# Altium PCB FOC_ESC.PcbDoc
Units mil, origin at the board's own origin, x right, y up, seen from the top; angles counter-clockwise.
Board outline 6000 x 5000 mil, 4 copper layers (Top Layer, PGND, PWR, Bottom Layer), stack 71.2 mil thick; 68 components, 57 nets, 269 pads, 20 vias.
Unrouted connection lines stored in the file: 70.
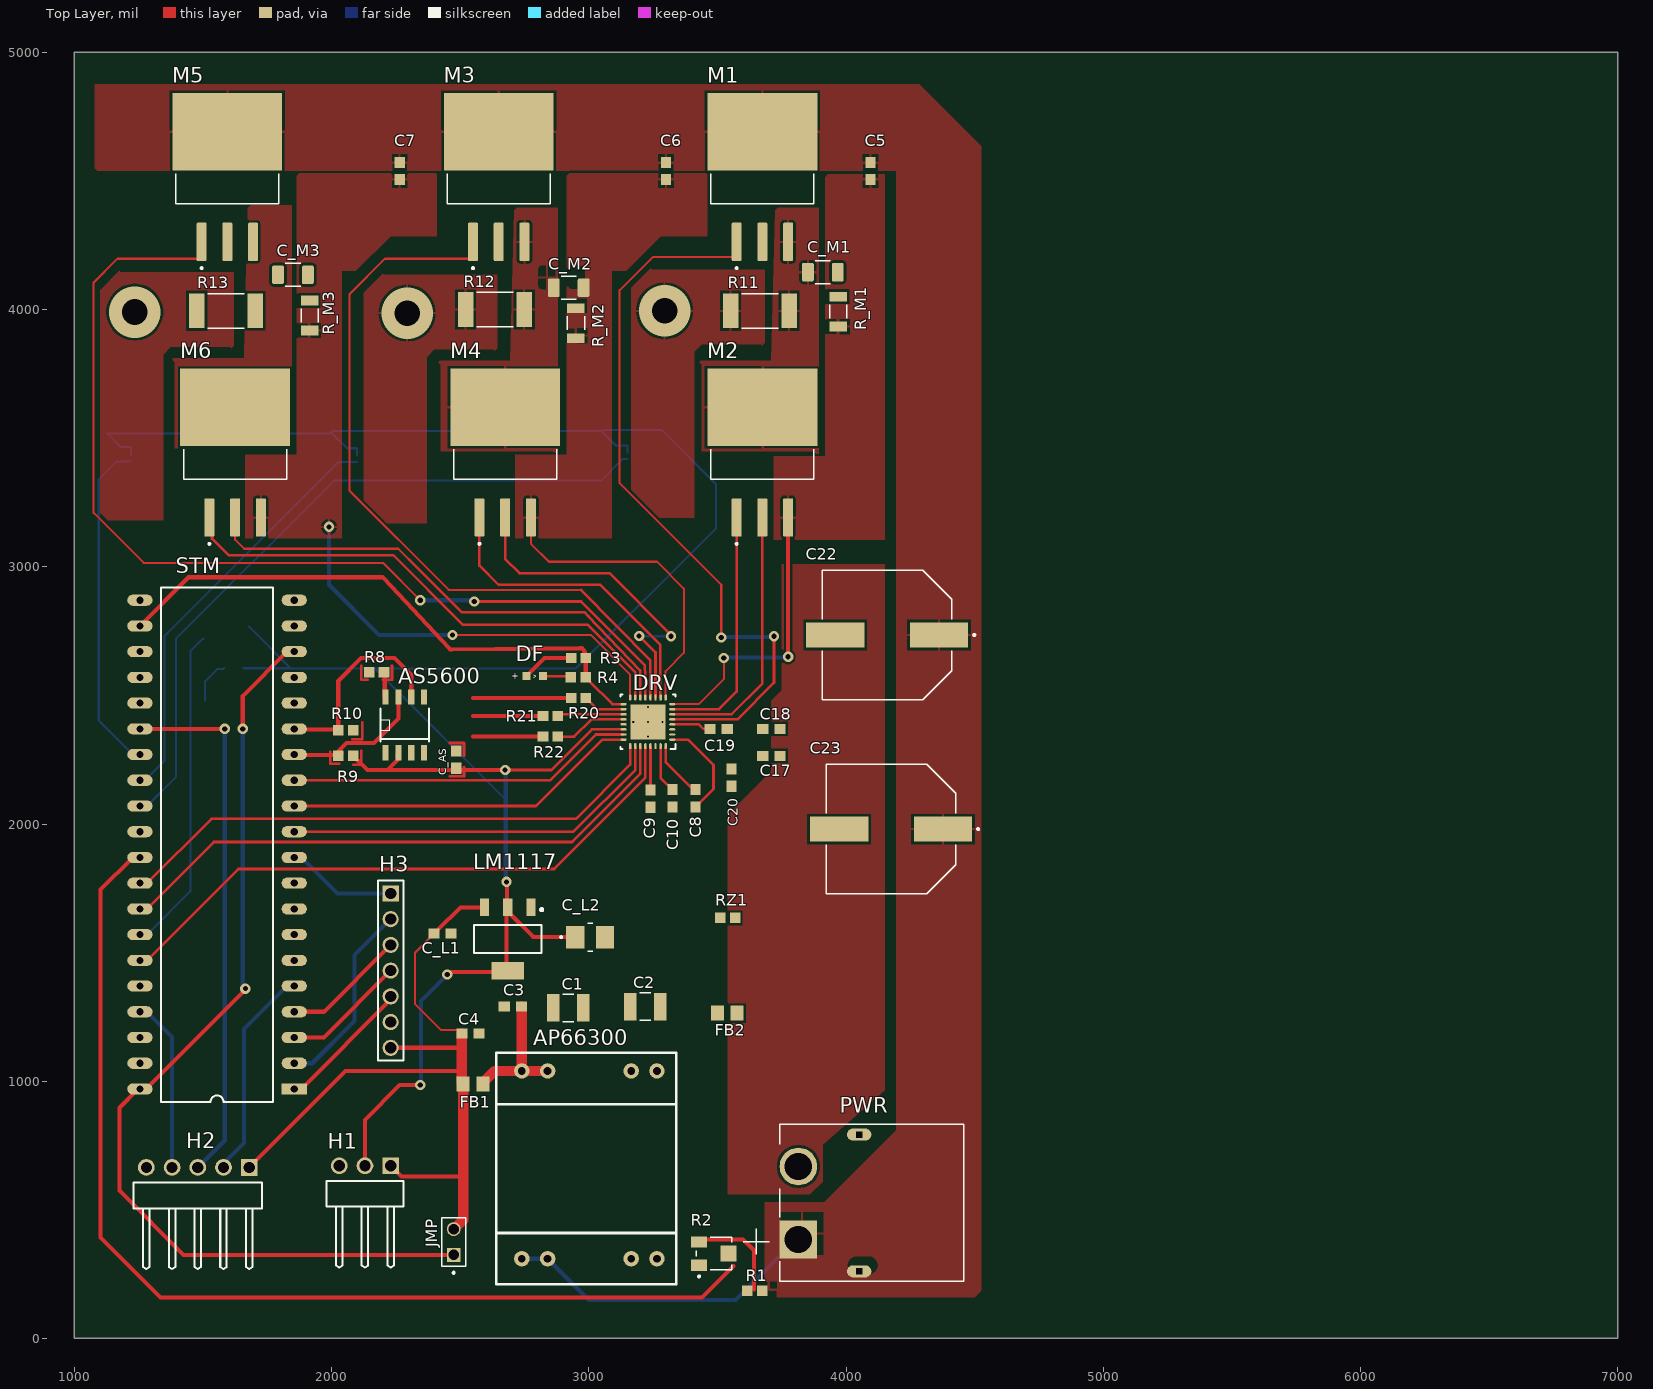
[diagram p0: Top Layer view]
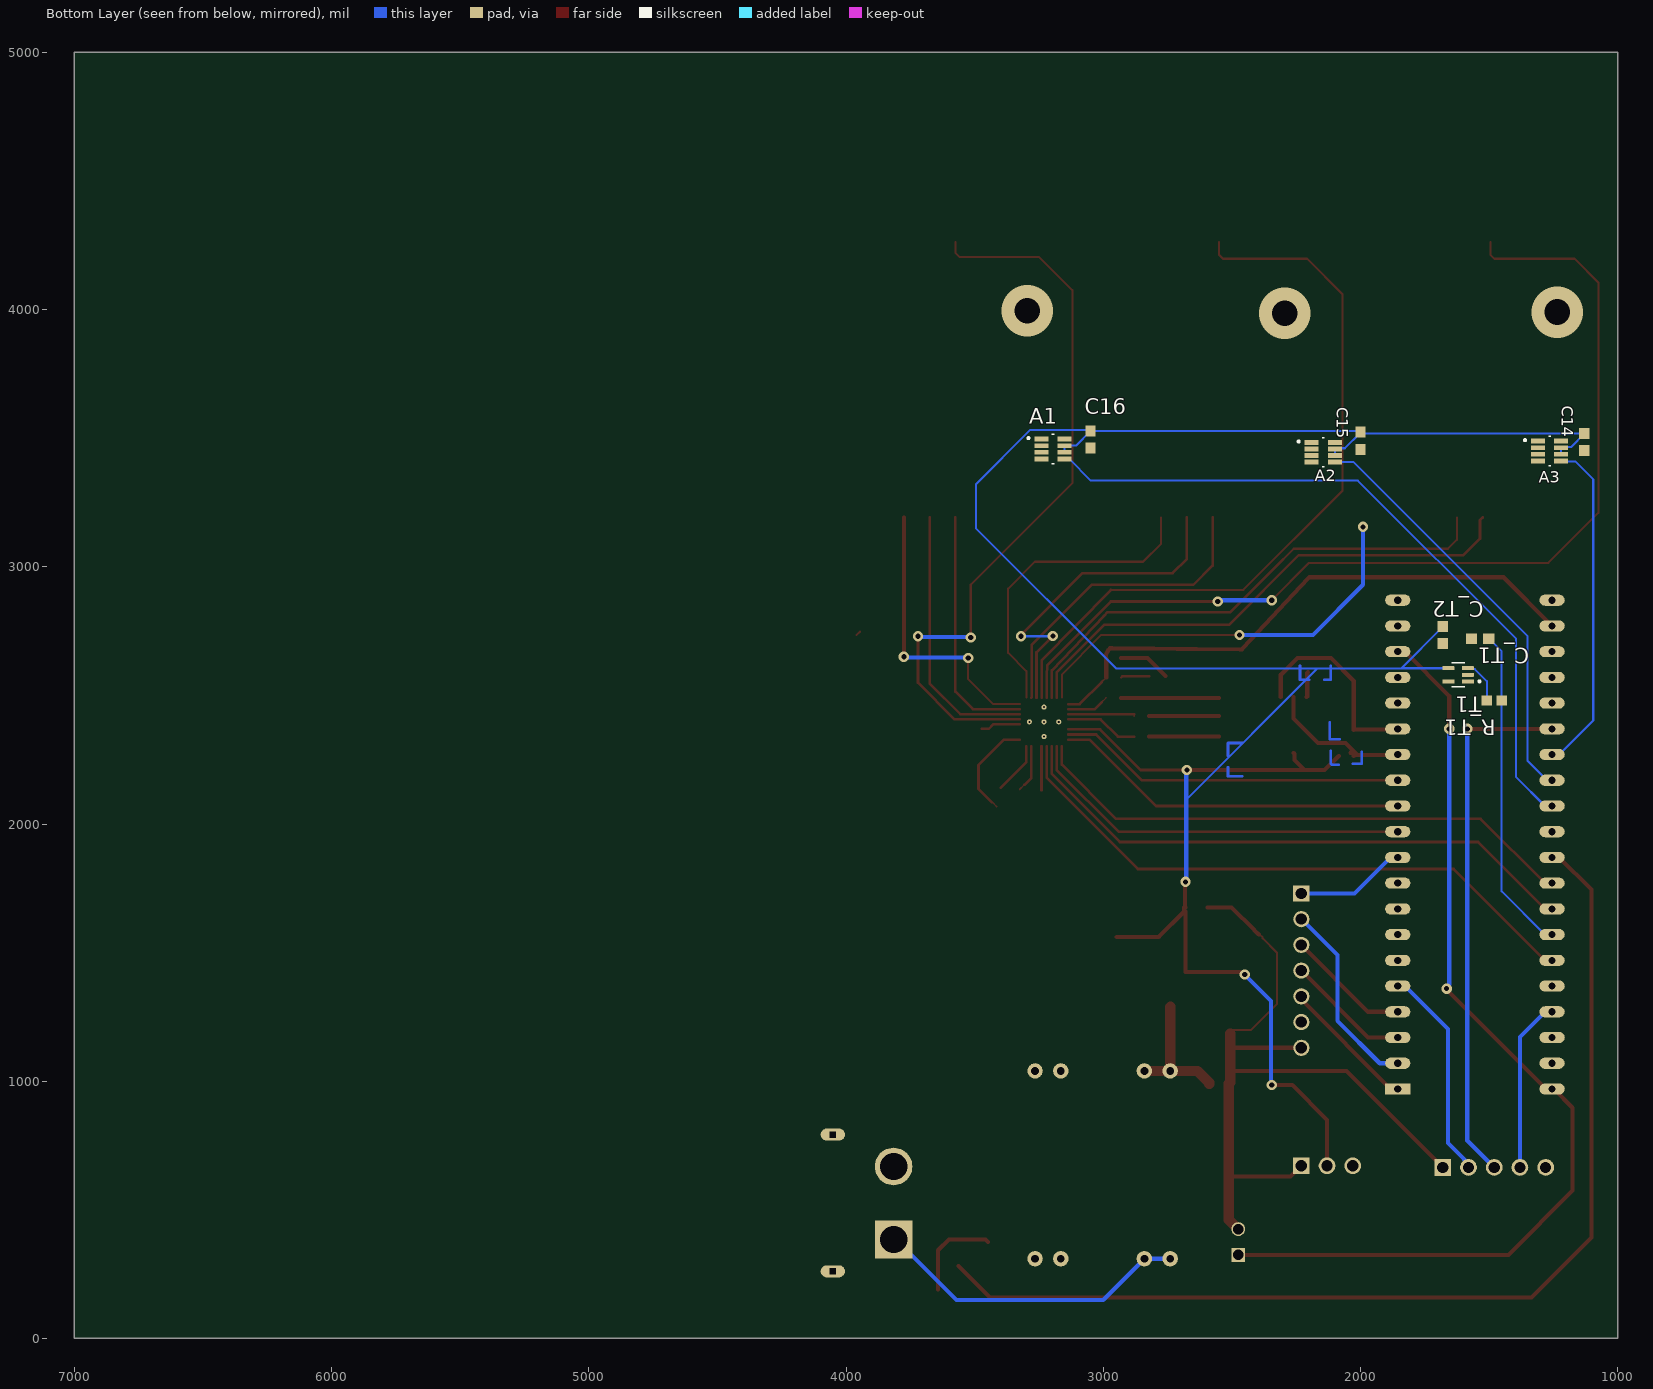
[diagram p1: Bottom Layer view, seen from below]
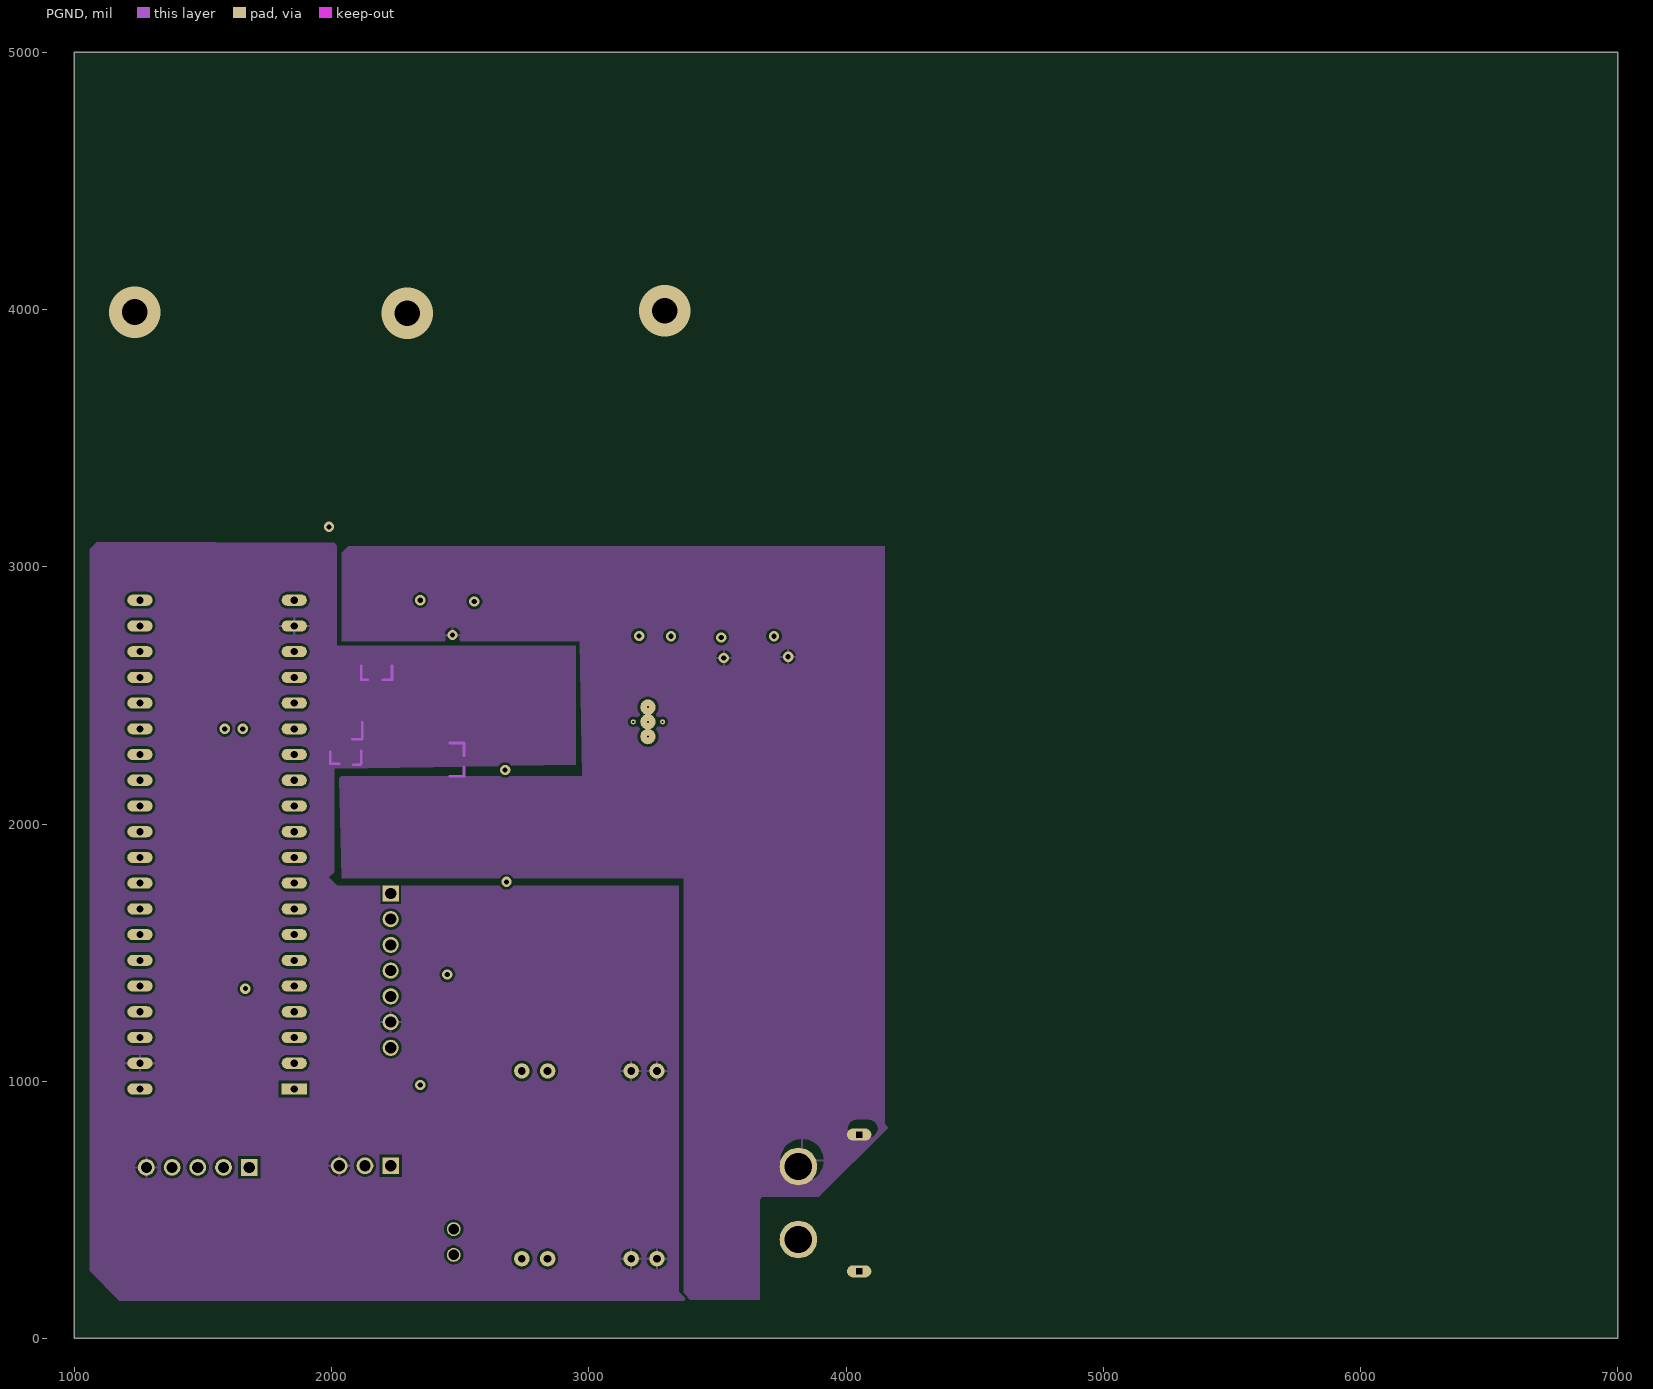
[diagram p2: PGND]
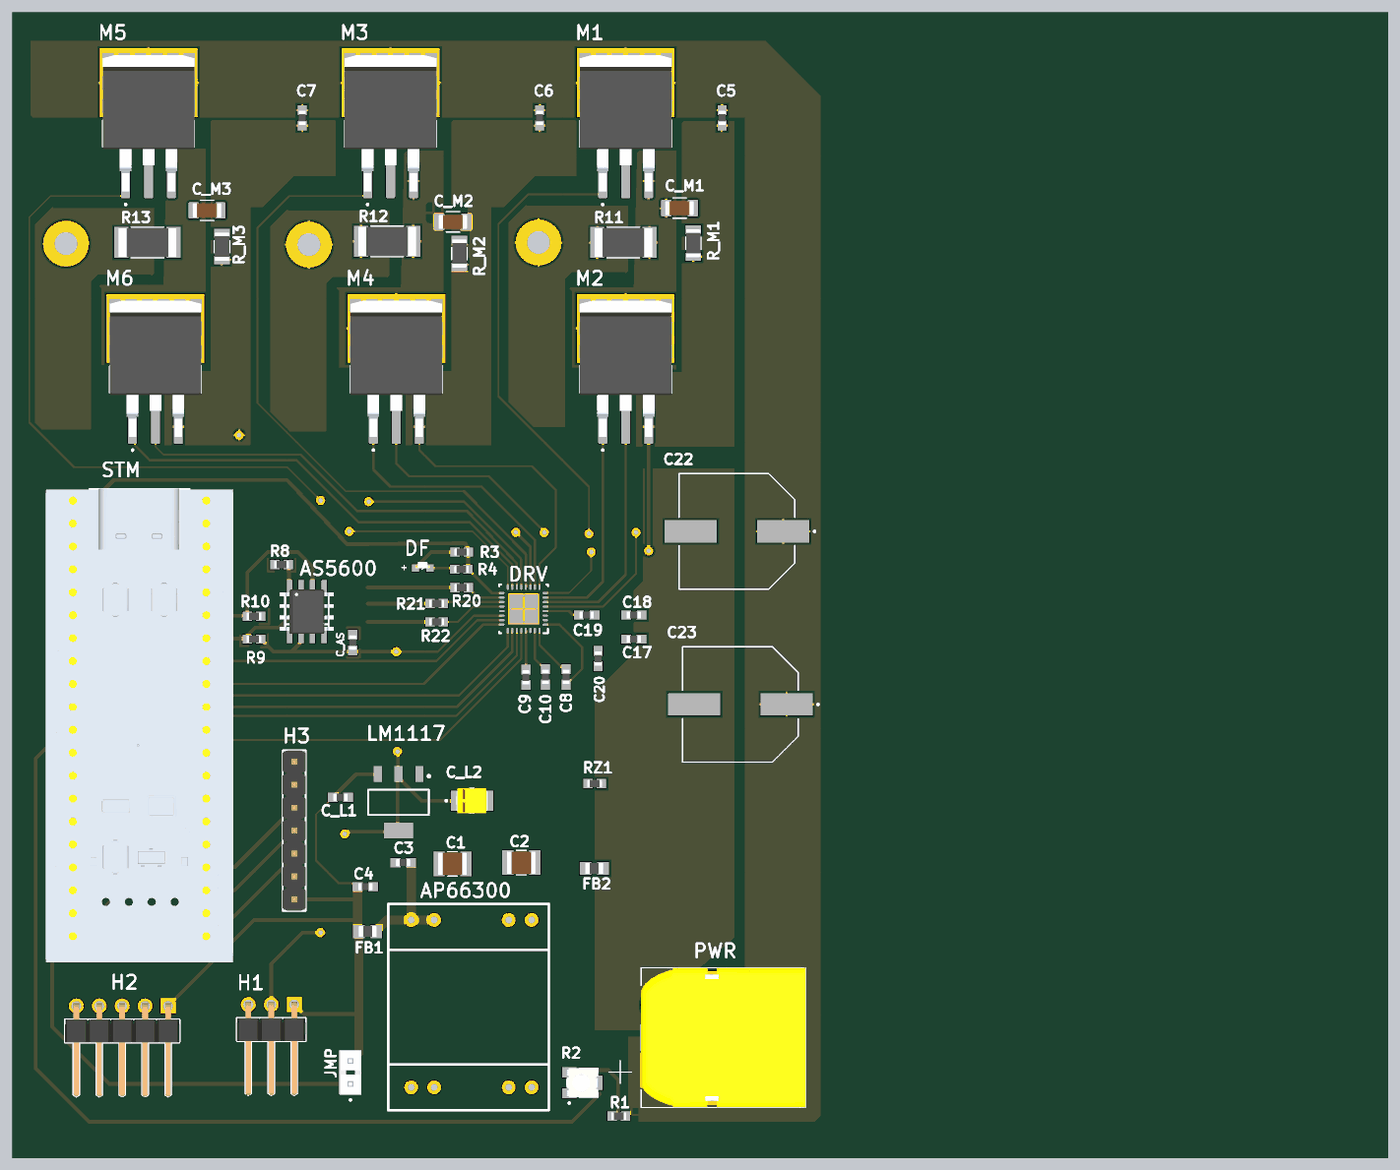
[diagram p3: 3D render of the assembled board from above, using the file's embedded part models]
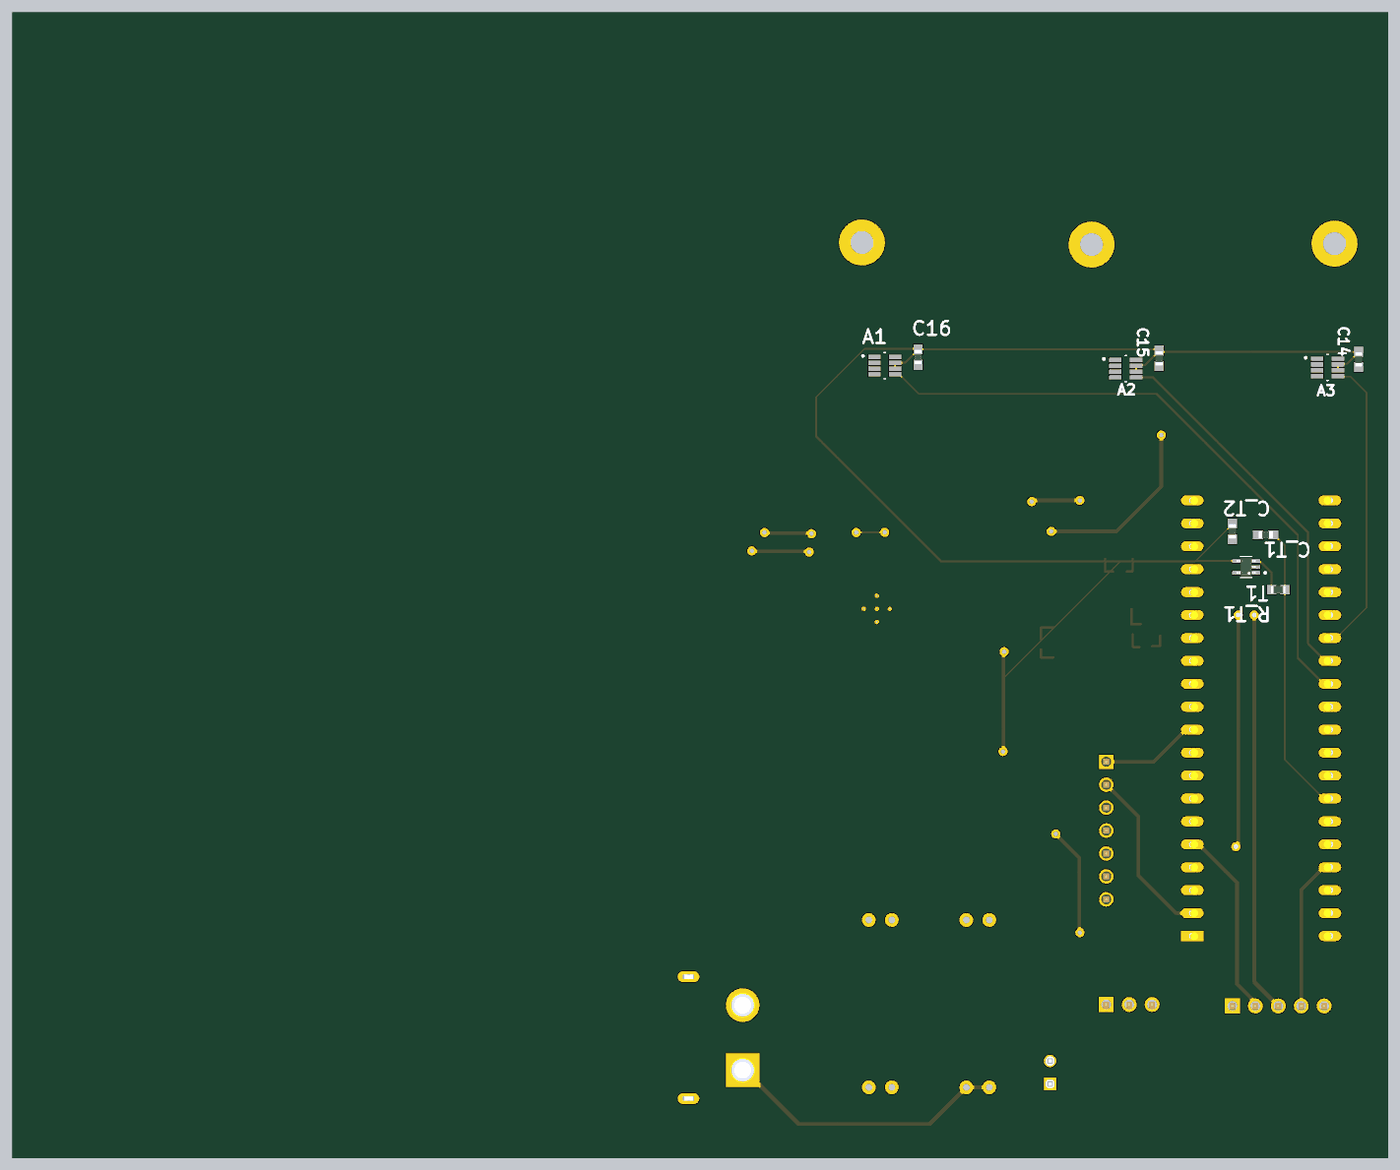
[diagram p4: 3D render of the assembled board from below, using the file's embedded part models]

## Layer stack, top to bottom
Top Solder: solder mask 0.4, Solder Resist, Dk 3.5
Top Layer: signal copper 2.8
Dielectric 1: core 20, FR-4 High Tg, Dk 4.2
PGND: signal copper 2.8
Dielectric 3: prepreg 20, FR-4 High Tg, Dk 4.2
PWR: signal copper 2.8
Dielectric 2: core 20, FR-4 High Tg, Dk 4.2
Bottom Layer: signal copper 2.8
Bottom Solder: solder mask 0.4, Solder Resist, Dk 3.5

## Board outline
1000,0 7000,0 7000,5000 1000,5000

## Design rules (kind name [scope] priority, off if disabled: settings)
Clearance [All] p1: gap=9 ignorepadtopadclearanceinfootprint=FALSE except(10: SMDPad-Fill SMDPad-Poly SMDPad-Region THPad-Fill THPad-Poly THPad-Region Via-Fill Via-Poly Via-Region Fill-Fill Fill-Poly Fill-Region Poly-Poly Poly-Region Region-Region)
PolygonConnect [All] p1: connectstyle=Relief reliefconductorwidth=10 reliefentries=4 polygonreliefangle="90 Angle" airgapwidth=10
RoutingVias [All] p1: holewidth=20 width=40 viastyle="Through Hole" minholewidth=20 minwidth=40 maxholewidth=28 maxwidth=50
SolderMaskExpansion [All] p1: expansion=4 istentingtop=FALSE
SupplyNets "Schematic Supply Nets" [InNet('3V3')] p1: voltage=0.000
SupplyNets "Schematic Supply Nets_8" [InNet('5V_STM')] p2: voltage=0.000
SupplyNets "Schematic Supply Nets_5" [InNet('PGND')] p3: voltage=0.000
SupplyNets "Schematic Supply Nets_4" [InNet('+5')] p4: voltage=0.000
SupplyNets "Schematic Supply Nets_2" [InNet('VBAT')] p5: voltage=0.000
SupplyNets "Schematic Supply Nets_1" [InNet('GND')] p6: voltage=0.000
Width [All] p1: maxlimit=16 minlimit=6 preferedwidth=10 toplayer_prefwidth=8 midlayer1_minwidth=10 midlayer1_maxwidth=10 midlayer2_minwidth=10 midlayer2_maxwidth=10 bottomlayer_prefwidth=8 minimp=50.000000 maximp=50.000000 favimp=50.000000
30 further rules are at their usual default settings.

## Components (designator, comment, footprint, x,y, rotation, side; value= is the part's Value field where it differs from the comment)
A1 "INA241A4IDDFR" SOT65P280X110-8N 3195.28,3457.79 r180 bottom
A2 "INA241A4IDDFR" SOT65P280X110-8N 2145,3445 r180 bottom
A3 "INA241A4IDDFR" SOT65P280X110-8N 1265,3450 r180 bottom
AP66300 "" MP1584 2740,310 r90 top (schematic designator "Buck- AP66300")
AS5600 "AS5600" SOIC8 2285,2385 r0 top
C1 "10uF 1210" CAPC3225X280N 2920,1285 r0 top
C2 "10uF 1210" CAPC3225X280N 3220,1290 r180 top
C3 "1uF 0603" CAPC1608X90 2705,1290 r0 top
C4 "1uF 0603" CAPC1608X90 2540,1185 r180 top
C5 "2.2uF 0603" CAPC1608X90 4095,4538.46 r270 top
C6 "2.2uF 0603" CAPC1608X90 3300,4538.47 r270 top
C7 "2.2uF 0603" CAPC1608X90 2265,4538.47 r270 top
C8 "47nF 0603" CAPC1608X90 3415,2100 r270 top
C9 "1uF 6.3V 0603" CAPC1608X90 3240,2098.46 r90 top
C10 "1uF 16V 0603" CAPC1608X90 3325,2100 r270 top
C14 "1uF 0603" CAPC1608X90 1130,3485 r90 bottom
C15 "1uF 0603" CAPC1608X90 2000,3490 r90 bottom
C16 "1uF 0603" CAPC1608X90 3050,3495 r90 bottom
C17 "0.1uF 100V 0603" CAPC1608X90 3710,2265 r180 top
C18 "0.1uF 12-25V 0603" CAPC1608X90 3710,2370 r180 top
C19 "0.1uF 100V 0603" CAPC1608X90 3505,2370 r0 top
C20 "2.2uF 0603" CAPC1608X90 3555,2180 r270 top
C22 "390uF Electrolytic" CAPAE1280X1400N 4160,2735 r180 top
C23 "390uF Electrolytic" CAPAE1280X1400N 4175,1980 r180 top
C_AS "1uF 0603" CAPC1608X90 2485,2250 r90 top
C_L1 "1uF 0603" CAPC1608X90 2431.54,1575 r180 top
C_L2 "10uF Tantalum" CAPMP3528X210N 3005,1560 r0 top
C_M1 "3900pF 1206" CAPC3216X110N 3910,4145 r180 top
C_M2 "3900pF 1206" CAPC3216X110N 2921.93,4085 r180 top
C_M3 "3900pF 1206" CAPC3216X110N 1850,4135 r180 top
C_T1 "1uF 0603" CAPC1608X90 1680,2735 r270 bottom
C_T2 "1uF 0603" CAPC1608X90 1535,2720 r180 bottom
DF "WL-SMCW_0603" WL-SMCW_0603 2790,2575 r180 top
DRV "DRV8350HRTVT" RTV0032E 3230,2397.09 r180 top
FB1 "Ferrite Bead 0805" FB_MI0805K400R-10 2550,990 r180 top
FB2 "Ferrite Bead 0805" FB_MI0805K400R-10 3538.31,1265 r180 top
H1 "61300311021" 61300311021 2130,480 r0 top
H2 "61300511021" 61300511021 1480,473.66 r0 top
H3 "61300711121" 61300711121 2230,1430 r270 top
JMP "3-644456-2" TE_3-644456-2 2475,325 r90 top
LM1117 "LM1117IMP-3.3/NOPB" DCY0004A_N 2685,1553.03 r270 top
M1 "CSD19536KTTT" TO254P1524X483-4N 3675,4515 r90 top
M2 "CSD19536KTTT" TO254P1524X483-4N 3675,3443.62 r90 top
M3 "CSD19536KTTT" TO254P1524X483-4N 2650,4515 r90 top
M4 "CSD19536KTTT" TO254P1524X483-4N 2675,3443.62 r90 top
M5 "CSD19536KTTT" TO254P1524X483-4N 1595,4515 r90 top
M6 "CSD19536KTTT" TO254P1524X483-4N 1625,3443.62 r90 top
PWR "XT60PW-M" AMASS_XT60PW-M 4051.22,526.73 r270 top
R1 "160k 0603" RESC1607X60N 3645,185.03 r180 top
R2 "0-10k POT" TRIM_3313J-2-104E 3486.11,330 r270 top
R3 "4.7K 0603" RESC1607X60N 2958.94,2570 r0 top
R4 "4.7K 0603" RESC1607X60N 2960,2645 r0 top
R8 "1K 0603" RESC1607X60N 2175,2590 r180 top
R9 "10K 0603" RESC1607X60N 2055,2265 r0 top
R10 "10K 0603" RESC1607X60N 2055,2365 r0 top
R11 "1m Ohm 2512" RESC6432X90N 3665,3995 r180 top
R12 "1m Ohm 2512" RESC6432X90N 2635,4000 r180 top
R13 "1m Ohm 2512" RESC6432X90N 1590,3995 r180 top
R20 "47K 0603" RESC1607X60N 2960,2490 r180 top (schematic designator RMODE)
R21 "18K 0603 or NC" RESC1607X60N 2851.06,2420 r180 top (schematic designator RIDRIVE)
R22 "75K 0603 or NC" RESC1607X60N 2851.06,2340 r180 top (schematic designator RVDS)
R_M1 "1.5Ohm 1206" RESC3116X65N 3970,3991.73 r270 top
R_M2 "1.5Ohm 1206" RESC3116X65N 2950,3946.84 r270 top
R_M3 "1.5Ohm 1206" RESC3116X65N 1915,3976.73 r270 top
R_T1 "1K 0603" RESC1607X60N 1480,2480 r180 bottom
RZ1 "0E 0603" RESC1607X60N 3540,1635 r180 top
STM "Black_Pill" Black_Pill_STM32F401CCU6 1551.85,1914.88 r180 top
T1 "TMP235A4DCKR" SOT65P210X110-5N 1620,2580 r0 bottom

## Footprints (in the part's own frame and the unit in brackets; to place one, negate y for a bottom-side part, rotate by r counter-clockwise, add the part's x,y. Pads: shape width x height; smd on the part's side, far side on the other; paste and mask are expansions set on the pad)
61300311021 [mm] "2.54 mm THT Angled Pin Header, 3p"
  rect 1.65x1.65 hole 1.1: 1(2.54,4.86)
  round 1.65 hole 1.1: 2(0,4.86) 3(-2.54,4.86)
  silkscreen extent -3.81,-5.18 3.81,3.36, body extent -3.81,-5.18 3.81,5.18, height 2.62
61300511021 [mm] "2.54 mm THT Angled Pin Header, 5p"
  rect 1.65x1.65 hole 1.1: 1(5.08,4.86)
  round 1.65 hole 1.1: 2(2.54,4.86) 3(0,4.86) 4(-2.54,4.86) 5(-5.08,4.86)
  silkscreen extent -6.35,-5.18 6.35,3.36, body extent -6.35,-5.18 6.35,5.18, height 2.62
61300711121 [mm] "7 pins, 1 row, straight, gold plating"
  rect 1.6x1.6 hole 1.1: 1(-7.62,0)
  round 1.6 hole 1.1: 2(-5.08,0) 3(-2.54,0) 4(0,0) 5(2.54,0) 6(5.08,0) 7(7.62,0)
  silkscreen extent -8.89,-1.27 8.89,1.27, body extent -8.89,-1.27 8.89,1.27, height 8.57
AMASS_XT60PW-M [mm]
  rect 3.716x3.716 / inner round 3.716 / far side rect 3.716x3.716 hole 2.7: 1(3.6,-6)
  round 3.716 hole 2.7: 2(-3.6,-6)
  oval 1.2x2.4 hole 0.6 square: S1(6.75,0) S2(-6.75,0)
  silkscreen extent -7.75,-11.43 7.75,10.35, body extent -7.75,-7.85 7.75,10.35, height 8.4
Black_Pill_STM32F401CCU6 [mm]
  rect 2.5x1.1 hole 0.7: 1(-7.7,24)
  oval 2.5x1.1 hole 0.7: 2(-7.7,21.46) 3(-7.7,18.92) 4(-7.7,16.38) 5(-7.7,13.84) 6(-7.7,11.3) 7(-7.7,8.76) 8(-7.7,6.22) 9(-7.7,3.68) 10(-7.7,1.14) 11(-7.7,-1.4) 12(-7.7,-3.94) 13(-7.7,-6.48) 14(-7.7,-9.02) 15(-7.7,-11.56) 16(-7.7,-14.1) 17(-7.7,-16.64) 18(-7.7,-19.18) 19(-7.7,-21.72) 20(-7.7,-24.26) 21(7.54,-24.26) 22(7.54,-21.72) 23(7.54,-19.18) 24(7.54,-16.64) 25(7.54,-14.1) 26(7.54,-11.56) 27(7.54,-9.02) 28(7.54,-6.48) 29(7.54,-3.94) 30(7.54,-1.4) 31(7.54,1.14) 32(7.54,3.68) 33(7.54,6.22) 34(7.54,8.76) 35(7.54,11.3) 36(7.54,13.84) 37(7.54,16.38) 38(7.54,18.92) 39(7.54,21.46) 40(7.54,24)
  silkscreen extent -5.61,-25.53 5.46,25.27, body extent -10.49,-25.6 10.29,26.94, height 10.46
CAPAE1280X1400N [mm]
  rect 5.75x2.47 smd: 1(-5.12,0) 2(5.12,0)
  silkscreen extent -8.7,-6.4 6.4,6.4
CAPC1608X90 [mm]
  rect 1.1x1 smd: 1(-0.85,0) 2(0.85,0)
  body extent -0.8,-0.4 0.8,0.4, height 0.9
CAPC3216X110N [mm]
  rrect25% 1.16x1.82 smd: 1(-1.475,0) 2(1.475,0)
  silkscreen extent -0.75,-1.13 0.75,1.13, body extent -1.6,-0.8 1.6,0.8, height 1.8
CAPC3225X280N [mm]
  rect 1.24x2.73 smd: 1(-1.485,0) 2(1.485,0)
  silkscreen extent -0.54,-1.36 0.54,1.36, body extent -1.6,-1.25 1.6,1.25, height 2.8
CAPMP3528X210N [mm]
  rect 1.79x2.21 smd: 1(-1.46,0) 2(1.46,0)
  silkscreen extent -2.95,-1.4 0.25,1.4, body extent -1.75,-1.4 1.75,1.4, height 2.1
DCY0004A_N [mm]
  rect 1.75x0.9 smd paste+0 mask+0.051: 1(-3.125,2.3) 2(-3.125,0) 3(-3.125,-2.3)
  rect 1.75x3.2 smd paste+0 mask+0.051: 4(3.125,0)
  silkscreen extent -3.02,-3.35 1.4,3.48
FB_MI0805K400R-10 [mm]
  rect 1.285x1.47 smd: 1(-0.973,0) 2(0.973,0)
  body extent -1,-0.63 1,0.63, height 1.1
MP1584 [mil]
  round 60 hole 30: 1(0,0) 2(0,-100) 3(0,-425) 4(0,-525) 5(730,-525) 6(730,-425) 7(730,-100) 8(730,0)
  silkscreen extent -100,-600 800,100
RESC1607X60N [mm]
  rect 1.04x1.02 smd: 1(-0.735,0) 2(0.735,0)
  body extent -0.8,-0.4 0.8,0.4, height 0.55
RESC3116X65N [mm]
  rect 0.97x1.73 smd: 1(-1.48,0) 2(1.48,0)
  silkscreen extent -0.67,-0.85 0.67,0.85, body extent -1.55,-0.8 1.55,0.8, height 0.65
RESC6432X90N [mm]
  rect 1.54x3.42 smd: 1(-2.89,0) 2(2.89,0)
  silkscreen extent -1.8,-1.7 1.8,1.7, body extent -3.2,-1.6 3.2,1.6, height 0.9
RTV0032E [mm]
  oval 0.6x0.24 smd paste+0 mask+0.051: 1(-2.4,1.75) 2(-2.4,1.25) 3(-2.4,0.75) 4(-2.4,0.25) 5(-2.4,-0.25) 6(-2.4,-0.75) 7(-2.4,-1.25) 8(-2.4,-1.75) 17(2.4,-1.75) 18(2.4,-1.25) 19(2.4,-0.75) 20(2.4,-0.25) 21(2.4,0.25) 22(2.4,0.75) 23(2.4,1.25) 24(2.4,1.75)
  oval 0.24x0.6 smd paste+0 mask+0.051: 9(-1.75,-2.4) 10(-1.25,-2.4) 11(-0.75,-2.4) 12(-0.25,-2.4) 13(0.25,-2.4) 14(0.75,-2.4) 15(1.25,-2.4) 16(1.75,-2.4) 25(1.75,2.4) 26(1.25,2.4) 27(0.75,2.4) 28(0.25,2.4) 29(-0.25,2.4) 30(-0.75,2.4) 31(-1.25,2.4) 32(-1.75,2.4)
  rect 3.45x3.45 smd paste-1.712 mask+0.051: 33(0,0)
  round 0.5 hole 0.203 paste-2539.97 mask+0.051: V(-1.45,0) V(1.45,0)
  round 0.5 / inner round 1.524 / far side round 0.5 hole 0.203 paste-2539.97 mask+0.051: V(0,1.45) V(0,0) V(0,-1.45)
  silkscreen extent -2.7,-2.7 2.7,2.7
SOIC8 [mm]
  rect 0.6x1.5 smd: 1(-1.905,-2.75) 2(-0.635,-2.75) 3(0.635,-2.75) 4(1.905,-2.75) 5(1.905,2.75) 6(0.635,2.75) 7(-0.635,2.75) 8(-1.905,2.75)
  silkscreen extent -2.5,-1.64 2.4,1.64, body extent -3,-2.45 3,2.45, height 1.75
SOT65P210X110-5N [mm]
  rrect25% 1.19x0.4 smd: 1(-0.96,0.65) 2(-0.96,0) 3(-0.96,-0.65) 4(0.96,-0.65) 5(0.96,0.65)
  silkscreen extent -2.2,-1.17 0.62,1.17, body extent -1.05,-1 1.05,1, height 1.1
SOT65P280X110-8N [mm]
  rect 1.37x0.48 smd: 1(-1.15,0.975) 2(-1.15,0.325) 3(-1.15,-0.325) 4(-1.15,-0.975) 5(1.15,-0.975) 6(1.15,-0.325) 7(1.15,0.325) 8(1.15,0.975)
  silkscreen extent -2.52,-1.45 0.1,1.45
TE_3-644456-2 [mm]
  rect 1.37x1.37 / inner round 1.37 / far side rect 1.37x1.37 hole 1.02: 1(0,0)
  round 1.37 hole 1.02: 2(2.54,0)
  silkscreen extent -1.87,-1.17 3.66,1.17, body extent -1.12,-1.17 3.66,1.17, height 10.03
TO254P1524X483-4N [mm]
  rrect25% 3.79x0.99 smd: 1(-6.4,2.54) 2(-6.4,0) 3(-6.4,-2.54)
  rect 7.62x10.84 smd paste-6: 4(4.48,0)
  silkscreen extent -9.1,-5.08 0.35,5.08, body extent -7.55,-5.08 7.55,5.08, height 4.7
TRIM_3313J-2-104E [mm]
  rect 1.1x1.6 smd paste+0 mask+0.102: 1(1.15,-1.45) 3(-1.15,-1.45)
  rect 1.6x1.6 smd paste+0 mask+0.102: 2(0,1.45)
  silkscreen extent -1.6,-1.75 2.35,1.75, body extent -1.6,-1.75 1.6,1.75, height 2.4
WL-SMCW_0603 [mm]
  rect 0.8x0.8 smd: 1(-0.8,0) 2(0.8,0)
  silkscreen extent -0.1,-0.14 0.1,0.13, body extent -0.8,-0.7 0.8,0, height 0.4

## Part data
A1 A2 A3: library part INA241A3IDDFR, "-5-V to 110-V bidirectional ultraprecise current sense amplifier with enhanced PWM rejection", Package=None, Availability="In Stock", Check_prices=https://www.snapeda.com/parts/INA241A3IDDFR/Texas+Instruments/view-part/?ref=eda, MF="Texas Instruments", MP=INA241A3IDDFR, Price=None, Purchase-URL=https://pricing.snapeda.com/search?q=INA241A3IDDFR&ref=eda, SnapEDA_Link=https://www.snapeda.com/parts/INA241A3IDDFR/Texas+Instruments/view-part/?ref=snap
AP66300: library part "MP1584 Buck Convertor"
AS5600: "Hall Effect Sensor Rotary Position External Magnet, Not Included Gull Wing", Package=None, Check_prices=https://www.snapeda.com/parts/AS5600/ams/view-part/?ref=eda, MF="Ams AG", MP=AS5600, SnapEDA_Link=https://www.snapeda.com/parts/AS5600/ams/view-part/?ref=snap
C1 C2: library part C1210C106K5RACTU, "10 ÂµF Â±10% 50V Ceramic Capacitor X7R 1210 (3225 Metric)", Package="1210-2 KEMET", Check_prices=https://www.snapeda.com/parts/C1210C106K5RACTU/KEMET/view-part/?ref=eda, MF=KEMET, MP=C1210C106K5RACTU, SnapEDA_Link=https://www.snapeda.com/parts/C1210C106K5RACTU/KEMET/view-part/?ref=snap
C3 C4 C5 C6 C7 C8 C9 C10 C14 C15 C16 C17 C18 C19 C20 C_AS C_L1 C_T1 C_T2: library part CC0603KRX7R9BB104, "0.1 ÂµF Â±10% 50V Ceramic Capacitor X7R 0603 (1608 Metric)", Package="0603 Yageo", Check_prices=https://www.snapeda.com/parts/CC0603KRX7R9BB104/Yageo/view-part/?ref=eda, MF=Yageo, MP=CC0603KRX7R9BB104, SnapEDA_Link=https://www.snapeda.com/parts/CC0603KRX7R9BB104/Yageo/view-part/?ref=snap
C22 C23: library part EDH475M450A9RAA, "ALU Electrolytic, SMD, EDH, +85Â°C, 450VDC, 12.5ÂµF, 12.5 x 13.5", Package="Radial KEMET", Check_prices=https://www.snapeda.com/parts/EDH475M450A9RAA/KEMET/view-part/?ref=eda, MF=KEMET, MP=EDH475M450A9RAA, SnapEDA_Link=https://www.snapeda.com/parts/EDH475M450A9RAA/KEMET/view-part/?ref=snap
C_L2: library part T543B337K2R5AHW035, "Cap Tant Polymer 330uF 2.5VDC B CASE 10% (3.5 X 2.8 X 1.9mm) SMD 3528-21 0.035 Ohm 105Â°C T/R", Package="SMD-2 Kemet", Availability="In Stock", Check_prices=https://www.snapeda.com/parts/T543B337K2R5AHW035/KEMET/view-part/1714462/?ref=eda, MF=KEMET, MP=T543B337K2R5AHW035, Price=None, Purchase-URL=https://pricing.snapeda.com/search/part/T543B337K2R5AHW035/?ref=eda, SnapEDA_Link=https://www.snapeda.com/parts/T543B337K2R5AHW035/KEMET/view-part/1714462/?ref=snap
C_M1 C_M2 C_M3: library part C1206C104K2RACTU, "1206 C 100nF Ceramic Multilayer Capacitor, 200 V, +125degC, X7R Dielec, +/-10%", Package="1206-2 KEMET", Check_prices=https://www.snapeda.com/parts/C1206C104K2RACTU/KEMET/view-part/?ref=eda, MF=KEMET, MP=C1206C104K2RACTU, SnapEDA_Link=https://www.snapeda.com/parts/C1206C104K2RACTU/KEMET/view-part/?ref=snap
DF: "0603, Bright Green, Typ.(@20mA): 570nm, 40mcd, 2.0V, 140Â° AlInGaP", Package="0603 WÃ¼rth Elektronik", Check_prices=https://www.snapeda.com/parts/150060VS75000/Wurth+Electronics/view-part/?ref=eda, MF="Wurth Elektronik", MP=150060VS75000, SnapEDA_Link=https://www.snapeda.com/parts/150060VS75000/Wurth+Electronics/view-part/?ref=snap
DRV: "102-V max 3-phase smart gate driver 32-WQFN -40 to 125", Manufacturer_Name="Texas Instruments", Copyright="Copyright (C) 2025 Ultra Librarian. All rights reserved.", Datasheet=https://www.ti.com/lit/gpn/drv8350, Manufacturer_Part_Number=DRV8350HRTVT, RefDes=RefDes, Type=TYPE
FB1 FB2: library part MI0805K400R-10, "EMI Ferrite Chip Bead, 0805, 1500MA, 40 Ohms @100MHz, DCR Max 0.050Ohm", Package="0805 Laird", Check_prices=https://www.snapeda.com/parts/MI0805K400R-10/Laird-Signal+Integrity+Products/view-part/?ref=eda, MF="Laird-Signal Integrity Products", MP=MI0805K400R-10, SnapEDA_Link=https://www.snapeda.com/parts/MI0805K400R-10/Laird-Signal+Integrity+Products/view-part/?ref=snap
H1: "WR-PHD 2.54 mm THT Angled Pin Header, 3p", Rated Current="3 A", Withstanding Voltage="500 VAC", Working Voltage="250 VAC", ComponentLink1Description=Manufacturer, ComponentLink1URL=http://www.we-online.de, ComponentLink2Description=Datasheet, ComponentLink2URL=http://katalog.we-online.de/em/datasheet/6130xx11021.pdf, Part Number=61300311021, Pin Number=3, Pitch="2.54 mm", Published Date="Aug 2017", Publisher="Wurth Elektronik"
H2: "WR-PHD 2.54 mm THT Angled Pin Header, 5p", Rated Current="3 A", Withstanding Voltage="500 VAC", Working Voltage="250 VAC", ComponentLink1Description=Manufacturer, ComponentLink1URL=http://www.we-online.de, ComponentLink2Description=Datasheet, ComponentLink2URL=http://katalog.we-online.de/em/datasheet/6130xx11021.pdf, Part Number=61300511021, Pin Number=5, Pitch="2.54 mm", Published Date="Aug 2017", Publisher="Wurth Elektronik"
H3: "WR-PHD 2.54 mm THT Pin Header, 7p", Rated Current="3 A", Withstanding Voltage="500 VAC", Working Voltage="250 VAC", ComponentLink1Description=Manufacturer, ComponentLink1URL=http://www.we-online.de, ComponentLink2Description=Datasheet, ComponentLink2URL=http://katalog.we-online.de/em/datasheet/6130xx11121.pdf, Part Number=61300711121, Pin Number=7, Pitch="2.54 mm", Published Date="Aug 2017", Publisher="Wurth Elektronik"
JMP: "HEADER ASSEMBLY, NARROW, MTA-100, 2 POSITION, STRAIGHT", Package=None, Check_prices=https://www.snapeda.com/parts/3-644456-2/TE+Connectivity+AMP+Connectors/view-part/?ref=eda, MF="TE Connectivity", MP=3-644456-2, SnapEDA_Link=https://www.snapeda.com/parts/3-644456-2/TE+Connectivity+AMP+Connectors/view-part/?ref=snap
LM1117: library part LM1117IMP-3.3NOPB, "800-mA 15-V linear voltage regulator 4-SOT-223 -40 to 125", Manufacturer_Name="Texas Instruments", Copyright="Copyright (C) 2025 Ultra Librarian. All rights reserved.", Manufacturer_Part_Number=LM1117IMP-3.3/NOPB, RefDes=RefDes, Type=TYPE
M1 M2 M3 M4 M5 M6: "100-V, N channel NexFETâ„¢ power MOSFET, single D2PAK, 2.4 mOhm", Package="TO-263-3 Texas Instruments", Check_prices=https://www.snapeda.com/parts/CSD19536KTT/Texas+Instruments/view-part/?ref=eda, MF="Texas Instruments", MP=CSD19536KTT, SnapEDA_Link=https://www.snapeda.com/parts/CSD19536KTT/Texas+Instruments/view-part/?ref=snap
PWR: "Socket, DC supply, male, PIN: 2", Package=Package, Availability="Not in stock", Check_prices=https://www.snapeda.com/parts/XT60PW-M/AMASS/view-part/?ref=eda, MF=AMASS, MP=XT60PW-M, Price=None, SnapEDA_Link=https://www.snapeda.com/parts/XT60PW-M/AMASS/view-part/?ref=snap
R1 R3 R4 R8 R9 R10 R20 R21 R22 R_T1 RZ1: library part RC0603JR-070RL, "0 Ohms Jumper 0.1W, 1/10W Chip Resistor 0603 (1608 Metric) Moisture Resistant Thick Film", Package="0603 Yageo", Check_prices=https://www.snapeda.com/parts/RC0603JR-070RL/Yageo/view-part/?ref=eda, MF=Yageo, MP=RC0603JR-070RL, SnapEDA_Link=https://www.snapeda.com/parts/RC0603JR-070RL/Yageo/view-part/?ref=snap
R2: library part 3313J-2-104E, "100 kOhms 0.125W, 1/8W J Lead Surface Mount Trimmer Potentiometer Cermet 1.0 Turn Top Adjustment", Package="SMD-3 Bourns", Check_prices=https://www.snapeda.com/parts/3313J-2-104E/Bourns/view-part/?ref=eda, MF=Bourns, MP=3313J-2-104E, SnapEDA_Link=https://www.snapeda.com/parts/3313J-2-104E/Bourns/view-part/?ref=snap
R11 R12 R13: library part CRE2512-FZ-R007E-3, "Resistor, Metal Strip, Res 0.007 Ohms, Pwr-Trg 3 W, Tol 1%, SMD", Package="6432 Stackpole", Check_prices=https://www.snapeda.com/parts/CRE2512-FZ-R007E-3/Bourns/view-part/?ref=eda, MF=Bourns, MP=CRE2512-FZ-R007E-3, SnapEDA_Link=https://www.snapeda.com/parts/CRE2512-FZ-R007E-3/Bourns/view-part/?ref=snap
R_M1 R_M2 R_M3: library part RC1206JR-0713RL, "13 Ohms Â±5% 0.25W, 1/4W Chip Resistor 1206 (3216 Metric) Moisture Resistant Thick Film", Package="3116 Yageo", Availability="In Stock", Check_prices=https://www.snapeda.com/parts/RC1206JR-0713RL/Yageo/view-part/?ref=eda, MF=Yageo, MP=RC1206JR-0713RL, Price=None, Purchase-URL=https://pricing.snapeda.com/search/part/RC1206JR-0713RL/?ref=eda, SnapEDA_Link=https://www.snapeda.com/parts/RC1206JR-0713RL/Yageo/view-part/?ref=snap
STM: "STM32F401CCU6"
T1: "1C analog temperature sensor, 10 mV/C", Package="SC70-5 Texas Instruments", Check_prices=https://www.snapeda.com/parts/TMP235A4DCKR/Texas+Instruments/view-part/?ref=eda, MF="Texas Instruments", MP=TMP235A4DCKR, SnapEDA_Link=https://www.snapeda.com/parts/TMP235A4DCKR/Texas+Instruments/view-part/?ref=snap

## Via types
v1: diameter 40, hole 20, Top Layer to Bottom Layer, 17 vias
v2: diameter 200, hole 100, Top Layer to Bottom Layer, 3 vias

## Nets (pads, with @x,y where several pads share a name; then routed paths per layer and width w, separated by ;. In a path a pad name is that pad's centre, name@x,y a point inside that pad or via, vN(x,y) a via of type N, cw(c..) or ccw(c..) an arc to the next point about the centre after c; other vN are vias at no path point)
3V3: A1.6 A1.7 A2.6 A2.7 A3.6 A3.7 AS5600.2 C14.2 C15.2 C16.2 C_AS.1 C_L2.1 C_T1.1 DRV.22 H1.2 LM1117.2 LM1117.4 R9.2 R10.2 T1.4 | length 9559.2
  Top Layer w10: v1(2675,2210) 2855,2210 3012.56,2367.56 DRV.22
  Top Layer w16: R9.2 2084.33,2265 2139.33,2210 2217.99,2210 ; H1.2 2130,850 2265,985 v1(2345,985) ; AS5600.2 2256.19,2272.92 2256.19,2248.2 2217.99,2210 ; v1(2450,1415) 2456.49,1415 2466.49,1425 2680,1425 LM1117.2@2680,1659.33 ; v1(2675,2210) 2217.99,2210 ; LM1117.2@2680,1676.06 2682.5,1678.56 2682.5,1772.5 v1(2680,1775) ; LM1117.2 2685,1659.33 2784.33,1560 C_L2.1
  Bottom Layer w8: C14.2@1130,3516.5 1180.76,3465.74 1216.78,3465.74 A3.7 A3.6 ; C14.2 1995,3518.46 C15.2 ; T1.4 1840.91,2605.59 1841.84,2604.65 ; C_T1.1 1680,2766.5 1841.84,2604.65 ; A2.6 A2.7 2096.78,3460.74 2060.76,3460.74 2000,3521.5 C15.2 ; 2677.5,2095 2167.85,2604.65 ; A1.6 A1.7 3105.91,3470.59 3050,3526.5 C16.2 ; 1841.84,2604.65 2167.85,2604.65 ; C15.2 2005,3528.46 C16.2 ; 2167.85,2604.65 2949.65,2604.65 3495,3150 3495,3320 3283.07,3531.93 3053.46,3531.93 C16.2
  Bottom Layer w16: v1(2345,985) 2347.5,987.5 2347.5,1312.5 v1(2450,1415) ; v1(2675,2210) 2677.5,2207.5 2677.5,2095 2677.5,1777.5 v1(2680,1775)
5V_STM: JMP.1 STM.18 STM.40 | length 3822.6
  Top Layer w16: v1(1655,2370) 1655,2497.56 1827.44,2670 STM.18 ; v1(1665,1360) 1665,1356.22 1278.78,970 1248.06,970 1175,896.94 1175,575 1425,325 JMP.1
  Bottom Layer w16: v1(1655,2370) 1655,1376.49 1665,1366.49 v1(1665,1360)
+5: C4.2 C_L1.2 FB1.2 H1.1 H2.1 H3.7 JMP.2 LM1117.3 | length 3108
  Top Layer w8: C_L1.2@2394.57,1570 2391.1,1570 2380.42,1559.31 2380.42,1555.85 2325,1500.43 2325,1300 2425,1200 2491.54,1200 C4.2 ; FB1.2@2506.54,995.16 FB1.2
  Top Layer w16: H2.1 2055,1040 2506.54,1040 ; H1.1 2271.34,630 2511.69,630 ; H3.7 2506.54,1130 ; C_L1.2@2395,1570.43 2395.47,1570.43 2411.73,1586.69 2411.73,1587.16 2500.63,1676.06 LM1117.3
  Top Layer w40: JMP.2 2511.69,461.69 2511.69,630 FB1.2 ; FB1.2@2506.54,995.16 2506.54,1040 2506.54,1130 C4.2
ADC_A: A1.5 STM.29 | length 2768.8
  Bottom Layer w8: STM.29 1282.56,2070 1395,2182.44 1395,2720 2010,3335 3048.07,3335 3132.48,3419.41 A1.5
ADC_B: A2.5 STM.28 | length 1641.1
  Bottom Layer w8: STM.28 1275,2170 1350,2245 1350,2730 2026.61,3406.61 A2.5
ADC_C: A3.5 STM.27 | length 1306.8
  Bottom Layer w8: A3.5 1218.11,3410 1165,3410 1095,3340 1095,2402.44 1227.44,2270 STM.27
Battery_Sense: R2.2 STM.31 | length 4163.3
  Top Layer w16: STM.31 1227.44,1870 1102.44,1745 1102.44,392.56 1335,160 3440,160 3562.09,282.09
CS: H3.5 STM.1 | length 531.5
  Top Layer w16: STM.1 1882.56,970 2230,1317.44 H3.5
DRV_GH_A: DRV.5 M1.1 | length 2913.7
  Top Layer w8: v1(3515,2725) 3515,2930 3120,3325 3120,4075 3250,4205 3559.58,4205 3575,4220.42 M1.1
  Top Layer w10: DRV.5 3577.63,2406.93 3720,2549.3 v1(3720,2730)
  Bottom Layer w16: v1(3515,2725) 3517.5,2727.5 3717.5,2727.5 v1(3720,2730)
DRV_GH_B: DRV.12 M3.1 | length 2946.9
  Top Layer w8: M3.1 2550,4212.72 2534.58,4197.3 2207.3,4197.3 2070,4060 2070,3295 2455,2910 2970.26,2910
  Top Layer w10: 2970.26,2910 3239.84,2635.19 DRV.12
DRV_GH_C: DRV.13 M5.1 | length 3924.1
  Top Layer w6: 3006.49,2828.51 3010,2825
  Top Layer w8: M5.1 1495,4212.72 1479.58,4197.3 1167.3,4197.3 1075,4105 1075,3210 1270,3015 2200,3015 v1(2345,2870)
  Top Layer w10: v1(2555,2865) 2970,2865 3006.49,2828.51 ; 3010,2825 3218.12,2616.88 3218.18,2613.05 3219.47,2579.31 DRV.13
  Bottom Layer w16: v1(2345,2870) 2543.51,2870 2548.51,2865 v1(2555,2865)
DRV_GL_A: DRV.7 M2.1 | length 955.6
  Top Layer w10: DRV.7 3506.3,2446.3 3575,2515 M2.1
DRV_GL_B: DRV.10 M4.1 | length 1223.1
  Top Layer w10: M4.1 2575,3005 2650,2930 3045,2930 3278.53,2696.47 3278.53,2492.32 DRV.10
DRV_GL_C: DRV.15 M6.1 | length 2044.9
  Top Layer w10: M6.1 1535.4,3181.25 1535.4,3109.6 1600,3045 2240,3045 2510,2775 2995,2775 3180.79,2589.21 DRV.15
DRV_IDRIVE: DRV.19 R21.1 | length 256.9
  Top Layer w6: R21.1@2879,2419 R21.1
  Top Layer w10: R21.1@2880,2426.61 DRV.19
DRV_MODE: DRV.18 R20.1 | length 164.9
  Top Layer w6: R20.1 2989.33,2490 3006.41,2472.92 R20.1@3006.41,2472.53
  Top Layer w10: R20.1@3006.41,2472.53 3032.64,2446.3 DRV.18
DRV_nFAULT: DRV.17 R3.2 R4.2 STM.22 | length 2227.4
  Top Layer w6: R3.2 2988.27,2570 3005.35,2552.92 R3.2@3005.35,2552.53
  Top Layer w10: R3.2@3005.35,2552.53 3091.89,2465.98 DRV.17
  Top Layer w16: STM.22 1444.18,2959.18 2192.16,2959.18 2198.78,2959.18 2203.67,2954.3 2456.13,2683.78 2456.32,2683.59 2461.01,2678.9 2467.63,2678.9 ccw(c2467.63,2694.9) 2467.7,2678.9 2467.78,2678.9 2966.35,2683.45 2973.06,2683.45 2979.46,2677.05 2989.99,2657.08 R4.2 ; R3.2 2988.41,2570.53 R4.2@2988.41,2644.47
DRV_SH_A: A1.8 C_M1.2 DRV.6 M1.3 M2.2 M2.4 R11.1 | length 1045.6
  Top Layer w10: DRV.6 3555.66,2426.61 3675,2545.96 M2.2
DRV_SH_B: A2.8 C_M2.2 DRV.11 M3.3 M4.2 M4.4 R12.1 | length 1324
  Top Layer w10: M4.2 2675,3030 2730,2975 3080,2975 3320,2735 v1(3320,2730) ; v1(3195.96,2730.96) 3259.53,2667.39 DRV.11
  Bottom Layer w10: v1(3195.96,2730.96) 3196.44,2730.48 3319.52,2730.48 v1(3320,2730)
DRV_SH_C: A3.8 C_M3.2 DRV.14 M5.3 M6.2 M6.4 R13.1 | length 1980.3
  Top Layer w8: M6.2 1625,3105 1660,3070 2259.54,3070 2300.54,3029
  Top Layer w10: 2300.54,3029 2505.61,2823.94 2982.65,2823.94 2997.87,2808.71 3199.78,2597.09 3199.79,2596.81 DRV.14
DRV_VDS: DRV.20 R22.1 | length 283.2
  Top Layer w10: R22.1 2943.4,2340 3010.33,2406.93 DRV.20
DVDD: DF.2 R4.1 | length 201.6
  Top Layer w16: DF.2 2828.5,2645 R4.1
ENC_A: H2.2 STM.5 | length 835.1
  Bottom Layer w16: H2.2 1580,678.25 1596.44,694.68 1596.44,696.44 1660,760 1660,1202.56 1827.44,1370 STM.5
ENC_B: H2.3 STM.26 | length 2078.5
  Top Layer w16: STM.26 v1(1585,2370)
  Bottom Layer w16: H2.3 1585,770 v1(1585,2370)
ENC_C: H2.4 STM.37 | length 672.9
  Bottom Layer w16: STM.37 1282.56,1270 1380,1172.56 H2.4
GND: A1.2 A1.3 A2.2 A2.3 A3.2 A3.3 AP66300.3 AP66300.4 AP66300.5 AP66300.6 AS5600.4 C1.1 C2.1 C3.1 C4.1 C9.1 C10.2 C14.1 C15.1 C16.1 C_AS.2 C_L1.1 C_L2.2 C_T1.2 C_T2.1 DRV.33 FB2.2 H1.3 H2.5 H3.6 LM1117.1 R2.1 R8.2 R20.2 R21.2 R22.2 RZ1.2 STM.19 STM.39 T1.2 | length 925.3
  Top Layer w16: 2550,2340 R22.2 ; 2550,2420 R21.2 ; 2550,2490 R20.2
HALL_SCL: AS5600.7 R9.1 STM.14 | length 558.5
  Top Layer w16: STM.14 1857.5,2267.5 R9.1@2015.58,2267.5 ; R9.1 2017.37,2273.69 2019.17,2275.49 2058.68,2315 2165,2315 2260,2410 AS5600.7 ; R9.1@2036.94,2275.49 R9.1@2038.54,2277.08
HALL_SDA: AS5600.6 R10.1 STM.15 | length 798.6
  Top Layer w16: STM.15 1857.5,2367.5 2023.56,2367.5 R10.1 2026.06,2556.06 2115,2645 2245,2645 2310,2580 AS5600.6
INHA: DRV.23 STM.13 | length 1354.2
  Top Layer w10: STM.13 2850,2170 3027.87,2347.87 DRV.23
INHB: DRV.25 STM.32 | length 2168.6
  Top Layer w6: STM.32 STM.32@1282.56,1770
  Top Layer w10: STM.32@1282.56,1770 1532.56,2020 2950,2020 3161.1,2231.1 DRV.25
INHC: DRV.27 STM.33 | length 2270.3
  Top Layer w6: STM.33 STM.33@1282.56,1670
  Top Layer w10: STM.33@1282.56,1670 1542.56,1930 2935,1930 3200.47,2195.47 DRV.27
INLA: DRV.24 STM.12 | length 1387.5
  Top Layer w10: STM.12 2795,2070 3053.19,2328.19 DRV.24
INLB: DRV.26 STM.11 | length 1517.3
  Top Layer w10: STM.11 2940,1970 3180.79,2210.79 DRV.26
INLC: DRV.28 STM.35 | length 2381.8
  Top Layer w6: STM.35 STM.35@1282.56,1470
  Top Layer w10: STM.35@1282.56,1470 1637.56,1825 2865,1825 3220.16,2180.16 DRV.28
INT: H3.1 STM.10 | length 441.6
  Top Layer w16: H3.1@2223.88,1736.12 H3.1
  Bottom Layer w16: STM.10 1882.56,1870 2022.56,1730 H3.1
MISO: H3.4 STM.3 | length 482.7
  Top Layer w16: STM.3 1970,1170 H3.4
MOSI: H3.3 STM.4 | length 482.7
  Top Layer w16: STM.4 1970,1270 H3.3
NetAS5600_8: AS5600.8 R8.1 | length 104.2
  Top Layer w16: R8.1@2207.42,2586.51 R8.1 2206.97,2586.97 2206.97,2496.3 AS5600.8
"NetBuck- AP66300_7": AP66300.7 AP66300.8 C3.2 FB1.1 | length 525.2
  Top Layer w40: FB1.1 2588.31,993.64 2634.66,1040 AP66300.8 ; C3.2 2740,1288.46 AP66300.8 ; AP66300.7 AP66300.8
NetC8_1: C8.1 DRV.32 | length 202
  Top Layer w10: DRV.32@3299.06,2302.44 3299.06,2240.16 C8.1@3397.87,2141.34
NetC8_2: C8.2 DRV.1 | length 394.1
  Top Layer w6: C8.2 3415,2068.5 3431.69,2085.19 C8.2@3433.65,2085.19
  Top Layer w10: DRV.1 3385.59,2328.19 3485,2228.78 3485,2136.54 C8.2@3433.65,2085.19
NetC9_2: C9.2 DRV.29 | length 170.5
  Top Layer w10: C9.2 DRV.29@3240,2302.44
NetC10_1: C10.1 DRV.31 | length 189
  Top Layer w6: C10.1@3306.35,2152.12 3308.31,2152.12 3325,2135.43 C10.1
  Top Layer w10: DRV.31@3279.37,2302.44 3279.37,2179.09 C10.1@3306.35,2152.12
NetC19_1: C19.1 DRV.4 | length 154.2
  Top Layer w10: DRV.4 3427.76,2387.24 3445,2370 C19.1
NetC_M1_1: C_M1.1 R_M1.1
NetC_M2_1: C_M2.1 R_M2.1
NetC_M3_1: C_M3.1 R_M3.1
NetDF_1: DF.1 R3.1 | length 110.6
  Top Layer w8: R3.1@2925,2575 R3.1
  Top Layer w10: DF.1 R3.1@2925,2575
NetR1_2: R1.2 R2.3 | length 368.6
  Top Layer w16: R2.3@3447.91,375.28 3457.64,385 3600,385 3642.13,342.87 3642.13,190
NetR_T1_1: R_T1.1 T1.3 | length 169.4
  Bottom Layer w8: R_T1.1 1508.94,2555.26 1555.39,2601.72 1578.33,2601.72 T1.3
OUT_A: A1.1 R11.2
  other v2: 3295,3995
OUT_B: A2.1 R12.2
  other v2: 2294.06,3985.94
OUT_C: A3.1 R13.2
  other v2: 1235,3990
PGND: C5.2 C6.2 C7.2 C17.1 C18.1 C20.1 C22.2 C23.2 DRV.8 DRV.9 DRV.16 DRV.30 FB2.1 M2.3 M4.3 M6.3 PWR.2 R_M1.2 R_M2.2 R_M3.2 RZ1.1 | length 3987.5
  Top Layer w8: v1(2470,2735) 3007,2735 3161.1,2580.9 DRV.16 ; M4.3 2775,3090 2845.49,3019.51 3265.49,3019.51 3370,2915 3370,2665 3298.9,2593.9 DRV.9 ; DRV.8 3428.01,2465.98 3525,2562.98 v1(3525,2645) ; C22.2@3945,2748.43 C22.2
  Top Layer w16: v1(3775,2650) M2.3
  Bottom Layer w16: v1(1990,3155) 1990,2930 2185,2735 v1(2470,2735) ; v1(3525,2645) 3527.5,2647.5 3772.5,2647.5 v1(3775,2650)
SCK: H3.2 STM.2 | length 756.3
  Bottom Layer w16: STM.2 1925,1070 2090,1235 2090,1490 H3.2
Temp_Sense: C_T2.2 R_T1.2 STM.34 | length 1269.4
  Bottom Layer w8: STM.34 1282.56,1570 1451.06,1738.5 R_T1.2 1451.06,2671.5 1499.57,2720 C_T2.2
VBAT: AP66300.1 AP66300.2 C1.2 C2.2 C5.1 C6.1 C7.1 C17.2 C18.2 C19.2 C20.2 C22.1 C23.1 DRV.2 DRV.3 M1.2 M1.4 M3.2 M3.4 M5.2 M5.4 PWR.1 R1.1 | length 1262
  Bottom Layer w16: AP66300.1 AP66300.2 3000,150 3570.51,150 PWR.1@3828.78,408.27
pads on no net: A1.4 A2.4 A3.4 AS5600.1 AS5600.3 AS5600.5 DRV.21 DRV.V PWR.S1 PWR.S2 STM.6 STM.7 STM.8 STM.9 STM.16 STM.17 STM.20 STM.21 STM.23 STM.24 STM.25 STM.30 STM.36 STM.38 T1.1 T1.5

## Polygon pours and split planes (outlines as drawn)
no net on Top Layer "NONET_L01_P049" (solid, pour order 49): 4150,3010 4150,964.26 3910,753.32 3910,610 3860,560 3540,560 3540,2035 3710,2205 3710,2480 3750,2520 3750,3010
PGND on Top Layer "PGND_L01_P044" (solid, pour order 44): 3720,3430 3720,3105 4150,3105 4150,4145 4150,4525 3930,4525 3920,4515 3920,3430
VBAT on Top Layer "NONET_L01_P032" (solid, pour order 32): 1080,4875 4285,4875 4525,4635 4525,185 4500,160 3685,160 3685,530 3525,530 3915,530 4195,810 4195,4540 3920,4540 1090,4540 1080,4550
OUT_B on Top Layer "OUT_B_L01_P040" (solid, pour order 40): 2370,3170 2370,3815 2400,3845 2630,3845 2635,3840 2645,3850 2645,4135 2205,4135 2200,4140 2125,4065 2125,3200 2155,3170
PGND on Top Layer "NONET_L01_P042" (solid, pour order 42): 1665,3435 1665,3110 2040,3110 2040,4150 2095,4150 2230,4285 2410,4285 2410,4525 2405,4530 1875,4530 1865,4520 1865,3435
PGND on Top Layer "PGND_L01_P043" (solid, pour order 43): 2715,3435 2715,3110 3090,3110 3090,4150 3145,4150 3280,4285 3460,4285 3460,4525 3455,4530 2925,4530 2915,4520 2915,3435
DRV_SH_A on Top Layer "DRV_SH_A_L01_P038" (solid, pour order 38): 3725,4385 3735,4395 3895,4395 3895,3440 3890,3435 3875,3450 3440,3450 3440,3785 3430,3795 3435,3800 3710,3800
no net on Top Layer "NONET_L01_P036" (solid, pour order 36): 1675,4395 1685,4405 1845,4405 1845,3450 1840,3445 1825,3460 1390,3460 1390,3795 1380,3805 1385,3810 1660,3810
DRV_SH_B on Top Layer "DRV_SH_B_L01_P037" (solid, pour order 37): 2710,4385 2720,4395 2880,4395 2880,3440 2875,3435 2860,3450 2425,3450 2425,3785 2415,3795 2420,3800 2695,3800
no net on Top Layer "NONET_L01_P039" (solid, pour order 39): 1345,3180 1345,3825 1375,3855 1605,3855 1610,3850 1620,3860 1620,4145 1180,4145 1175,4150 1100,4075 1100,3210 1130,3180
OUT_A on Top Layer "OUT_A_L01_P041" (solid, pour order 41): 3410,3190 3410,3835 3440,3865 3670,3865 3675,3860 3685,3870 3685,4155 3245,4155 3240,4160 3165,4085 3165,3220 3195,3190
GND on PGND "GND_L02_P045" (solid, pour order 45): 1090,3097.5 1060,3067.5 1060,262.5 1175,147.5 3395,147.5 3390,152.5 3385,147.5 3350,182.5 3350,1760 2022.5,1760 1990,1792.5 2010,1812.5 2010,2215 2950,2229.84 2950,2692.5 2490,2692.5 2020,2692.5 2020,3082.5 2010,3092.5
PGND on PGND "PGND_L02_P046" (solid, pour order 46): 2040,3055 2040,2710 2965,2710 2975,2185 2640,2185 2030.19,2185 2040.19,1790 3370,1790 3370,150 3665,150 3665,540 3675,550 3895,550 4165,820 4150,835 4150,3080 2065,3080 2055,3070

## Other copper
Multi-Layer:
  lines w10: 1995,2280 1995,2235 2030,2235 ; 2080,2330 2120,2330 2120,2395 ; 2085,2230 2110,2230 2115,2235 2115,2285 ; 2115,2615 2115,2560 2140,2560 ; 2200,2560 2235,2560 2235,2615 ; 2460,2185 2515,2185 2515,2220 ; 2460,2315 2515,2315 2515,2265

## Text inside footprints (layer, text, board x,y; h text height)
DF: Top Overlay "+" at 2727.01,2586.81 h24 r180; Mechanical 13 "+" at 2727.01,2586.81 h24 r180